# EAGLE board CT_schematic (EAGLE 7.6.0)

Size 100 x 80 mm. Coordinates in mm from the lower left corner, seen from the top.
Outline: 0,0 100,0 100,80 0,80 0,0
Copper layers (1*16): Top 0.035mm / dielectric 1.5mm / Bottom 0.035mm
Design rules "default": minimum track width 10mil, minimum drill 24mil, track to track 8mil, track to pad 8mil, pad to pad 8mil, via to via 8mil, smd to smd 8mil, copper to edge 40mil, drill to drill 8mil, minimum pad ring 10mil, minimum via ring 8mil, stop-mask expansion 4mil, vias tented up to drill 0mil, thermal gap 10mil

## Footprints (pad centres in the part's own frame; a part is rotated, then mirrored left to right if it is on the bottom)
C0603 = smd 0.8 x 0.8: 1 -0.762,0; 2 0.762,0
C0402 = smd 0.5 x 0.5: 1 -0.508,0; 2 0.508,0
C0805 = smd 1.2 x 1.3: 1 -1.016,0; 2 1.016,0
C1206 = smd 1.3 x 1.6: 1 -1.524,0; 2 1.524,0
2220 = smd 1.85 x 5.5: 1 -2.55,0; 2 2.55,0
C1210 = smd 1.2 x 2.5: 1 -1.524,0; 2 1.524,0
EXV-9H = smd 3.505 x 1.676: 1 -2.857,0; 2 2.857,0
L0603 = smd 0.8 x 0.8: 1 -0.762,0; 2 0.762,0
IND_PM3316 = smd 2.921 x 2.794: 1 -5.144,0; 2 5.144,0
L1210 = smd 1.2 x 2.5: 1 -1.524,0; 2 1.524,0
PJ-037B_PACKAGE = drill 3.7 square: 1 12,0 | drill 3.2 square: 2 6,0
R0603 = smd 0.8 x 0.8: 1 -0.762,0; 2 0.762,0
LQFP64 = smd 0.3 x 1.2: 1 -3.75,-5.75; 2 -3.25,-5.75; 3 -2.75,-5.75; 4 -2.25,-5.75; 5 -1.75,-5.75; 6 -1.25,-5.75; 7 -0.75,-5.75; 8 -0.25,-5.75; 9 0.25,-5.75; 10 0.75,-5.75; 11 1.25,-5.75; 12 1.75,-5.75; 13 2.25,-5.75; 14 2.75,-5.75; 15 3.25,-5.75; 16 3.75,-5.75; 33 3.75,5.75; 34 3.25,5.75; 35 2.75,5.75; 36 2.25,5.75; 37 1.75,5.75; 38 1.25,5.75; 39 0.75,5.75; 40 0.25,5.75; 41 -0.25,5.75; 42 -0.75,5.75; 43 -1.25,5.75; 44 -1.75,5.75; 45 -2.25,5.75; 46 -2.75,5.75; 47 -3.25,5.75; 48 -3.75,5.75 | smd 1.2 x 0.3: 17 5.75,-3.75; 18 5.75,-3.25; 19 5.75,-2.75; 20 5.75,-2.25; 21 5.75,-1.75; 22 5.75,-1.25; 23 5.75,-0.75; 24 5.75,-0.25; 25 5.75,0.25; 26 5.75,0.75; 27 5.75,1.25; 28 5.75,1.75; 29 5.75,2.25; 30 5.75,2.75; 31 5.75,3.25; 32 5.75,3.75; 49 -5.75,3.75; 50 -5.75,3.25; 51 -5.75,2.75; 52 -5.75,2.25; 53 -5.75,1.75; 54 -5.75,1.25; 55 -5.75,0.75; 56 -5.75,0.25; 57 -5.75,-0.25; 58 -5.75,-0.75; 59 -5.75,-1.25; 60 -5.75,-1.75; 61 -5.75,-2.25; 62 -5.75,-2.75; 63 -5.75,-3.25; 64 -5.75,-3.75
SSOP-28 = smd 1.5 x 0.4: 1 -3.625,4.225; 2 -3.625,3.575; 3 -3.625,2.925; 4 -3.625,2.275; 5 -3.625,1.625; 6 -3.625,0.975; 7 -3.625,0.325; 8 -3.625,-0.325; 9 -3.625,-0.975; 10 -3.625,-1.625; 11 -3.625,-2.275; 12 -3.625,-2.925; 13 -3.625,-3.575; 14 -3.625,-4.225; 15 3.625,-4.225; 16 3.625,-3.575; 17 3.625,-2.925; 18 3.625,-2.275; 19 3.625,-1.625; 20 3.625,-0.975; 21 3.625,-0.325; 22 3.625,0.325; 23 3.625,0.975; 24 3.625,1.625; 25 3.625,2.275; 26 3.625,2.925; 27 3.625,3.575; 28 3.625,4.225
FCI_10118193-0001LF = smd 0.4 x 1.35: 1 -1.3,2.675; 2 -0.65,2.675; 3 0,2.675; 4 0.65,2.675; 5 1.3,2.675 | smd 1.6 x 1.4: 6 -3.2,2.45; 7 3.2,2.45 | smd 1.9 x 1.9: 8 -1.2,0; 9 1.2,0 | hole 0.5: -3.3,0; 3.3,0
AT24C02D = smd 1.6 x 0.6: 1 -2.475,1.905 | smd 1.55 x 0.6: 2 -2.475,0.635; 3 -2.475,-0.635; 4 -2.475,-1.905; 5 2.475,-1.905; 6 2.475,-0.635; 7 2.475,0.635; 8 2.475,1.905
TDFN-8/6MM = smd 0.3 x 0.75: 1 0,0; 2 0.5,0; 3 1,0; 4 1.5,0; 5 1.5,3; 6 1,3; 7 0.5,3; 8 0,3
SOIC-8 = smd 1.6 x 0.6: 1 -2.7,1.905 | smd 1.55 x 0.6: 2 -2.7,0.635; 3 -2.7,-0.635; 4 -2.7,-1.905; 5 2.7,-1.905; 6 2.7,-0.635; 7 2.7,0.635; 8 2.7,1.905
182-009-MALE = drill 1.194 pad 1.524 octagon: 1 -5.537,10.923; 2 -2.769,10.923; 3 0,10.923; 4 2.769,10.923; 5 5.537,10.923; 6 -4.153,8.08; 7 -1.384,8.08; 8 1.384,8.08; 9 4.153,8.08 | hole 3.048: -12.446,9.501; 12.446,9.501
QFN-32 = smd 0.6 x 0.3: 1 -2.3,1.75; 2 -2.3,1.25; 3 -2.3,0.75; 4 -2.3,0.25; 5 -2.3,-0.25; 6 -2.3,-0.75; 7 -2.3,-1.25; 8 -2.3,-1.75; 17 2.3,-1.75; 18 2.3,-1.25; 19 2.3,-0.75; 20 2.3,-0.25; 21 2.3,0.25; 22 2.3,0.75; 23 2.3,1.25; 24 2.3,1.75 | smd 0.3 x 0.6: 9 -1.75,-2.3; 10 -1.25,-2.3; 11 -0.75,-2.3; 12 -0.25,-2.3; 13 0.25,-2.3; 14 0.75,-2.3; 15 1.25,-2.3; 16 1.75,-2.3; 25 1.75,2.3; 26 1.25,2.3; 27 0.75,2.3; 28 0.25,2.3; 29 -0.25,2.3; 30 -0.75,2.3; 31 -1.25,2.3; 32 -1.75,2.3 | smd 3.2 x 3.2: EXP 0,0
SJ-43515TS-SMT-TR = smd 2.2 x 3: 1 0.6,-7.4; 4 3.4,-7.4 | smd 3 x 3: 2 12.8,-7.4; 5 17,-3 | smd 2 x 3: 3 5.3,0; 6 2.5,0 | drill 1.8: P$7 4.5,-3.69; P$8 11.54,-3.69
WM-64PC = drill 0.6 pad 1: 1 -1,0.95; 2 -1,-0.95
ASEK = smd 1.4 x 1: 1 -1.1,-0.8; 2 1.1,-0.8; 3 1.1,0.8; 4 -1.1,0.8
ASFL1 = smd 1.7 x 1.5: 1 -1.27,-1.1; 2 1.27,-1.1; 3 1.27,1.1; 4 -1.27,1.1
WSON-8 = smd 0.3 x 0.6: 1 -0.75,0; 2 0.05,0; 3 0.85,0; 4 1.65,0; 5 1.65,3.8; 6 0.85,3.8; 7 0.05,3.8; 8 -0.75,3.8 | smd 3 x 2.6: PAD 0.45,1.9
QFN-16_EP = smd 0.805 x 0.3: 1 -1.452,0.75; 2 -1.452,0.25; 3 -1.452,-0.25; 4 -1.452,-0.75; 9 1.452,-0.75; 10 1.452,-0.25; 11 1.452,0.25; 12 1.452,0.75 | smd 0.3 x 0.805: 5 -0.75,-1.452; 6 -0.25,-1.452; 7 0.25,-1.452; 8 0.75,-1.452; 13 0.75,1.452; 14 0.25,1.452; 15 -0.25,1.452; 16 -0.75,1.452 | smd 1.55 x 1.55: 17 0,0
DFN-8_DDB = smd 0.805 x 0.3: 1 -0.952,0.75; 2 -0.952,0.25; 3 -0.952,-0.25; 4 -0.952,-0.75; 5 0.952,-0.75; 6 0.952,-0.25; 7 0.952,0.25; 8 0.952,0.75 | smd 0.61 x 2.2: 9 0,0
SON-6 = smd 0.55 x 0.3: 1 -0.355,0.5 | smd 0.52 x 0.3: 2 -0.37,0; 3 -0.37,-0.5; 4 0.37,-0.5; 5 0.37,0; 6 0.37,0.5
SW_4-1437565-2 = smd 1.4 x 2.1: 1 -2.23,4.55; 2 -2.23,-4.55; 3 2.23,4.55; 4 2.23,-4.55
LGM67K-G1J2-24-Z = smd 0.8 x 1.4: A -2,0; C 0,0
NC7SZ125M5X = smd 1.3 x 0.7: 1 -1.3,0.95; 2 -1.3,0; 3 -1.3,-0.95; 4 1.3,-0.95; 5 1.3,0.95

## Placement (x,y rotation side)
C1  1e-06  [C0603]  -40.64,85.09 0 top  (outside the outline)
C2  1e-07  [C0603]  -44.45,85.09 0 top  (outside the outline)
C3  1e-07  [C0603]  -48.26,85.09 0 top  (outside the outline)
C4  1e-07  [C0603]  -52.07,85.09 0 top  (outside the outline)
C5  1e-07  [C0603]  -55.88,85.09 0 top  (outside the outline)
C6  1e-07  [C0603]  -59.69,85.09 0 top  (outside the outline)
C7  4.7e-06  [C0603]  -29.21,85.09 0 top  (outside the outline)
C8  1e-08  [C0603]  -63.5,85.09 0 top  (outside the outline)
C9  1e-06  [C0603]  -67.31,85.09 0 top  (outside the outline)
C10  1e-07  [C0402]  -15.24,95.25 0 top  (outside the outline)
C11  4.7e-06  [C0805]  -74.93,72.39 0 top  (outside the outline)
C12  1e-07  [C0402]  -19.05,95.25 0 top  (outside the outline)
C13  1e-07  [C0402]  -22.86,95.25 0 top  (outside the outline)
C14  1e-08  [C0402]  -26.67,95.25 0 top  (outside the outline)
C15  1e-08  [C0402]  -30.48,95.25 0 top  (outside the outline)
C16  1e-06  [C0603]  -71.12,85.09 0 top  (outside the outline)
C17  1e-06  [C0603]  -74.93,85.09 0 top  (outside the outline)
C18  1e-06  [C0603]  -78.74,85.09 0 top  (outside the outline)
C19  1e-06  [C0603]  -82.55,85.09 0 top  (outside the outline)
C20  1e-06  [C0603]  -86.36,85.09 0 top  (outside the outline)
C21  1e-06  [C0603]  -90.17,85.09 0 top  (outside the outline)
C22  1e-06  [C0603]  -15.24,90.17 0 top  (outside the outline)
C23  1e-06  [C0603]  -19.05,90.17 0 top  (outside the outline)
C24  1e-06  [C0603]  -22.86,90.17 0 top  (outside the outline)
C25  1e-07  [C0402]  -34.29,95.25 0 top  (outside the outline)
C26  1e-07  [C0402]  -38.1,95.25 0 top  (outside the outline)
C27  1e-07  [C0402]  -41.91,95.25 0 top  (outside the outline)
C28  1e-07  [C0402]  -45.72,95.25 0 top  (outside the outline)
C29  1e-06  [C0603]  -26.67,90.17 0 top  (outside the outline)
C30  1e-08  [C0402]  -49.53,95.25 0 top  (outside the outline)
C31  1e-08  [C0402]  -53.34,95.25 0 top  (outside the outline)
C32  1e-08  [C0402]  -57.15,95.25 0 top  (outside the outline)
C33  1e-08  [C0402]  -60.96,95.25 0 top  (outside the outline)
C34  1e-08  [C0402]  -64.77,95.25 0 top  (outside the outline)
C35  1e-05  [C1206]  -63.5,72.39 0 top  (outside the outline)
C36  1e-05  [C0805]  -80.01,72.39 0 top  (outside the outline)
C37  1e-05  [C0805]  -85.09,72.39 0 top  (outside the outline)
C38  1e-06  [C0603]  -30.48,90.17 0 top  (outside the outline)
C39  1e-07  [C0402]  -68.58,95.25 0 top  (outside the outline)
C40  6.8e-05  [2220]  -62.23,54.61 0 top  (outside the outline)
C41  1e-05  [C1210]  -50.8,72.39 0 top  (outside the outline)
C42  2.2e-06  [C0603]  -33.02,85.09 0 top  (outside the outline)
C43  2.2e-07  [C0603]  -36.83,85.09 0 top  (outside the outline)
C44  1e-07  [C0402]  -72.39,95.25 0 top  (outside the outline)
C45  0.0001  [EXV-9H]  -17.78,73.66 0 top  (outside the outline)
C46  0.0001  [EXV-9H]  -29.21,73.66 0 top  (outside the outline)
C47  1e-08  [C0402]  -76.2,95.25 0 top  (outside the outline)
F1  240.0  [L0603]  -34.29,90.17 0 top  (outside the outline)
I1  2.2e-06  [IND_PM3316]  -66.04,41.91 0 top  (outside the outline)
I2  1e-05  [L1210]  -57.15,72.39 0 top  (outside the outline)
J1  PJ-037B  [PJ-037B_PACKAGE]  -83.82,29.21 0 top  (outside the outline)
R2  1000.0  [R0603]  -38.1,90.17 0 top  (outside the outline)
R4  4700.0  [R0603]  -41.91,90.17 0 top  (outside the outline)
R5  2200.0  [R0603]  -45.72,90.17 0 top  (outside the outline)
R6  2200.0  [R0603]  -49.53,90.17 0 top  (outside the outline)
R7  2200.0  [R0603]  -53.34,90.17 0 top  (outside the outline)
R8  2200.0  [R0603]  -57.15,90.17 0 top  (outside the outline)
R9  10000.0  [R0603]  -40.64,80.01 0 top  (outside the outline)
R10  4700.0  [R0603]  -60.96,90.17 0 top  (outside the outline)
R11  10000.0  [R0603]  -45.72,80.01 0 top  (outside the outline)
R12  10000.0  [R0603]  -50.8,80.01 0 top  (outside the outline)
R13  10000.0  [R0603]  -55.88,80.01 0 top  (outside the outline)
R14  10000.0  [R0603]  -60.96,80.01 0 top  (outside the outline)
R15  10000.0  [R0603]  -66.04,80.01 0 top  (outside the outline)
R16  10000.0  [R0603]  -71.12,80.01 0 top  (outside the outline)
R17  10000.0  [R0603]  -76.2,80.01 0 top  (outside the outline)
R18  10000.0  [R0603]  -81.28,80.01 0 top  (outside the outline)
R19  10000.0  [R0603]  -86.36,80.01 0 top  (outside the outline)
R20  120.0  [R0603]  -64.77,90.17 0 top  (outside the outline)
R21  1270.0  [R0603]  -68.58,90.17 0 top  (outside the outline)
R22  1270.0  [R0603]  -72.39,90.17 0 top  (outside the outline)
R23  100000.0  [R0603]  -90.17,71.12 0 top  (outside the outline)
R24  200.0  [R0603]  -76.2,90.17 0 top  (outside the outline)
R25  1000.0  [R0603]  -80.01,90.17 0 top  (outside the outline)
R26  20000.0  [R0603]  -91.44,80.01 0 top  (outside the outline)
R27  91000.0  [R0603]  -15.24,85.09 0 top  (outside the outline)
R28  300000.0  [R0603]  -15.24,80.01 0 top  (outside the outline)
R29  100000.0  [R0603]  -20.32,80.01 0 top  (outside the outline)
R30  560000.0  [R0603]  -25.4,80.01 0 top  (outside the outline)
R31  10000.0  [R0603]  -20.32,85.09 0 top  (outside the outline)
R32  10000.0  [R0603]  -25.4,85.09 0 top  (outside the outline)
R33  9100.0  [R0603]  -83.82,90.17 0 top  (outside the outline)
R34  680000.0  [R0603]  -30.48,80.01 0 top  (outside the outline)
R35  120000.0  [R0603]  -35.56,80.01 0 top  (outside the outline)
U1  stm32f103rct7  [LQFP64]  -22.86,43.18 0 top  (outside the outline)
U2  FT232RL-REEL  [SSOP-28]  -60.96,7.62 0 top  (outside the outline)
U3  10118193-0001LF  [FCI_10118193-0001LF]  -69.85,63.5 0 top  (outside the outline)
U4  AT24C02D-SSHM-T  [AT24C02D]  -39.37,54.61 0 top  (outside the outline)
U5  24AA64T-I/MNY  [TDFN-8/6MM]  -24.13,53.34 0 top  (outside the outline)
U6  MCP2562-E/SN  [SOIC-8]  -53.34,54.61 0 top  (outside the outline)
U7  182-009-113R531  [182-009-MALE]  -36.83,6.35 0 top  (outside the outline)
U8  SGTL5000XNAA3  [QFN-32]  -83.82,41.91 0 top  (outside the outline)
U9  SJ-43515TS-SMT-TR  [SJ-43515TS-SMT-TR]  -92.71,10.16 0 top  (outside the outline)
U10  SJ-43515TS-SMT-TR  [SJ-43515TS-SMT-TR]  -39.37,31.75 0 top  (outside the outline)
U11  SJ-43515TS-SMT-TR  [SJ-43515TS-SMT-TR]  -67.31,31.75 0 top  (outside the outline)
U12  WM-64PCT  [WM-64PC]  -55.88,41.91 0 top  (outside the outline)
U13  ASEK-32.768KHz-ECST  [ASEK]  -91.44,63.5 0 top  (outside the outline)
U14  ASFL1-12MHZ-NCS  [ASFL1]  -44.45,64.77 0 top  (outside the outline)
U15  ASFL-24.57MHZ-NCS  [ASFL1]  -27.94,64.77 0 top  (outside the outline)
U16  ASFL1-25MHZ-NCS  [ASFL1]  -60.96,64.77 0 top  (outside the outline)
U17  LP3878SDX-ADJ/NOPB  [WSON-8]  -83.82,53.34 0 top  (outside the outline)
U18  LTC3601EUD#PBF  [QFN-16_EP]  -88.9,90.17 0 top  (outside the outline)
U19  LT3494AEDDB#TRMPBF  [DFN-8_DDB]  -80.01,95.25 0 top  (outside the outline)
U20  TPS3895ADRYR  [SON-6]  -85.09,93.98 0 top  (outside the outline)
U21  4-1437565-2  [SW_4-1437565-2]  -44.45,43.18 0 top  (outside the outline)
U22  Q65110A2395  [LGM67K-G1J2-24-Z]  -39.37,72.39 0 top  (outside the outline)
U23  nc7sz125m5x  [NC7SZ125M5X]  -68.58,71.12 0 top  (outside the outline)

## Library data of the parts
C1-C47 F1 I1 I2 J1 R2 R4-R35 U1-U23 = circuit_tree

## Nets
CLK_U1_3: U1.3 U13.3
CLK_U1_5: U1.5 U16.3
CLK_U2_27: U2.27 U14.3
CLK_U8_21: U8.21 U15.3
GND: C1.2 C2.2 C3.2 C4.2 C5.2 C6.2 C7.2 C8.2 C9.2 C10.2 C11.2 C12.2 C13.2 C14.2 C15.2 C16.2 C17.2 C25.2 C26.2 C27.2 C28.2 C29.2 C30.2 C31.2 C32.2 C33.2 C34.2 C35.2 C36.2 C37.2 C38.2 C40.1 C40.2 C41.2 C42.2 C43.2 C44.2 C45.2 C46.2 C47.2 J1.2 R2.2 R9.2 R12.2 R13.2 R15.2 R16.2 R17.2 R22.2 R25.2 R26.2 R28.2 R33.2 R35.2 U1.12 U1.18 U1.31 U1.47 U1.63 U2.7 U2.18 U2.21 U2.25 U2.26 U3.5 U3.6 U3.7 U3.8 U3.9 U4.4 U5.4 U5.7 U6.2 U6.8 U7.5 U8.1 U8.3 U8.7 U8.EXP U10.1 U11.1 U12.2 U13.2 U14.2 U15.2 U16.2 U17.3 U17.PAD U18.1 U18.9 U18.17 U19.2 U19.9 U20.2 U22.C U23.1 U23.3
NET_U1_7: R4.1 U1.7 U23.4
NET_U1_13: C8.1 C9.1 F1.1 U1.13
NET_U1_29: R7.1 U1.29 U4.6
NET_U1_30: R8.1 U1.30 U4.5
NET_U1_58: R5.1 U1.58 U5.6
NET_U1_59: R6.1 U1.59 U5.5
NET_U1_60: R9.1 U1.60
NET_U1_61: U22.A
NET_U1_62: U21.3 U21.4
NET_U2_14: R11.1 U2.14
NET_U2_17: C12.1 U2.17
NET_U2_19: R12.1 U2.19
NET_U3_1: R10.1 U3.1
NET_U3_2: U2.16 U3.2
NET_U3_3: U2.15 U3.3
NET_U3_19: R10.2
NET_U4_1: R14.1 U4.1
NET_U4_2: R15.1 U4.2
NET_U4_3: R16.1 U4.3
NET_U4_7: R13.1 U4.7
NET_U5_1: R17.1 U5.1
NET_U5_2: R18.1 U5.2
NET_U5_3: R19.1 U5.3
NET_U6_6: R20.2 U6.6
NET_U7_2: R20.2 U6.6 U7.2
NET_U7_3: R20.1 U6.7 U7.3
NET_U8_10: C28.1 U8.10
NET_U8_29: R21.1 U8.29
NET_U8_31: R22.1 U8.31
NET_U9_1: U8.4 U9.1
NET_U9_2: U8.2 U9.2
NET_U9_5: U8.6 U9.5
NET_U10_2: C19.1 U10.2
NET_U10_5: C18.1 U10.5
NET_U10_11: C19.2
NET_U10_12: C18.2
NET_U11_2: C21.1 C22.1 U11.2
NET_U11_5: C20.1 U11.5
NET_U11_13: C21.2 C22.2
NET_U11_14: C20.2
NET_U12_1: C23.1 C24.1 C29.1 U8.16 U12.1
NET_U12_15: C23.2 C24.2
NET_U17_1: C34.1 U17.1
NET_U17_6: R24.2 R25.1 U17.6
NET_U17_8: R23.1 U17.8
NET_U18_3: C39.2 I1.1 U18.3 U18.4
NET_U18_6: C39.1 U18.6
NET_U18_7: C38.1 U18.7 U18.12
NET_U18_10: R28.1 U18.10
NET_U18_11: R26.1 R27.1 U18.11
NET_U18_14: U18.14
NET_U18_ATNET_3: I1.2 R27.2
NET_U19_1: I2.1 U19.1
NET_U19_5: R29.1 U19.5
NET_U19_6: R30.1 U19.6
NET_U19_8: C43.1 U19.8
NET_U20_1: R32.1 R33.1 U20.1
NET_U20_3: R34.2 R35.1 U20.3
NET_U20_4: R31.1 U20.4 U23.2
NET_U21_1: R2.1 U21.1 U21.2
PROC_CAN_RX: U1.44 U6.4
PROC_CAN_TX: U1.45 U6.1
PROC_I2S2_CK: U1.34 U8.24
PROC_I2S2_SD: U1.36 U8.26
PROC_I2S2_WS: U1.33 U8.23
PROC_UART4_RX: U1.52 U2.1
PROC_UART4_TX: U1.51 U2.5
VCC_S1_4V8: C35.1 C37.1 C41.1 C45.1 C46.1 I2.2 J1.1 R23.2 R29.2 U17.4 U18.15 U18.16 U19.3 U19.4
VCC_TIER1_1V2: C25.1 C36.1 R24.1 U8.30 U17.5
VCC_TIER1_3V3: C1.1 C2.1 C3.1 C4.1 C5.1 C6.1 C7.1 C10.1 C11.1 C13.1 C14.1 C15.1 C17.1 C26.1 C27.1 C30.1 C31.1 C32.1 C33.1 C40.2 C44.1 C47.1 F1.2 I1.2 R4.2 R5.2 R6.2 R7.2 R8.2 R11.2 R14.2 R18.2 R19.2 R21.2 R27.2 R31.2 R32.2 R34.1 U1.1 U1.19 U1.32 U1.48 U1.64 U2.4 U2.20 U4.8 U5.8 U6.5 U8.5 U8.20 U13.4 U14.4 U15.4 U16.4 U18.8 U20.6 U23.5
VCC_TIER1_5V0: C16.1 C42.1 R30.2 U6.3 U19.7

## Tracks (layer width: path | path; a pad name or v marks a point on that pad's centre or on a via)
CLK_U1_3  (1 unrouted)
CLK_U1_5  (1 unrouted)
CLK_U2_27  (1 unrouted)
CLK_U8_21  (1 unrouted)
GND  (96 unrouted)
NET_U1_7  (2 unrouted)
NET_U1_13  (3 unrouted)
NET_U1_29  (2 unrouted)
NET_U1_30  (2 unrouted)
NET_U1_58  (2 unrouted)
NET_U1_59  (2 unrouted)
NET_U1_60  (1 unrouted)
NET_U1_62  (1 unrouted)
NET_U2_14  (1 unrouted)
NET_U2_17  (1 unrouted)
NET_U2_19  (1 unrouted)
NET_U3_1  (1 unrouted)
NET_U3_2  (1 unrouted)
NET_U3_3  (1 unrouted)
NET_U4_1  (1 unrouted)
NET_U4_2  (1 unrouted)
NET_U4_3  (1 unrouted)
NET_U4_7  (1 unrouted)
NET_U5_1  (1 unrouted)
NET_U5_2  (1 unrouted)
NET_U5_3  (1 unrouted)
NET_U6_6  (1 unrouted)
NET_U7_2  (2 unrouted)
NET_U7_3  (2 unrouted)
NET_U8_10  (1 unrouted)
NET_U8_29  (1 unrouted)
NET_U8_31  (1 unrouted)
NET_U9_1  (1 unrouted)
NET_U9_2  (1 unrouted)
NET_U9_5  (1 unrouted)
NET_U10_2  (1 unrouted)
NET_U10_5  (1 unrouted)
NET_U11_2  (2 unrouted)
NET_U11_5  (1 unrouted)
NET_U11_13  (1 unrouted)
NET_U12_1  (4 unrouted)
NET_U12_15  (1 unrouted)
NET_U17_1  (1 unrouted)
NET_U17_6  (2 unrouted)
NET_U17_8  (1 unrouted)
NET_U18_3  (3 unrouted)
NET_U18_6  (1 unrouted)
NET_U18_7  (2 unrouted)
NET_U18_10  (1 unrouted)
NET_U18_11  (2 unrouted)
NET_U18_ATNET_3  (1 unrouted)
NET_U19_1  (1 unrouted)
NET_U19_5  (1 unrouted)
NET_U19_6  (1 unrouted)
NET_U19_8  (1 unrouted)
NET_U20_1  (2 unrouted)
NET_U20_3  (2 unrouted)
NET_U20_4  (2 unrouted)
NET_U21_1  (2 unrouted)
PROC_CAN_RX  (1 unrouted)
PROC_CAN_TX  (1 unrouted)
PROC_I2S2_CK  (1 unrouted)
PROC_I2S2_SD  (1 unrouted)
PROC_I2S2_WS  (1 unrouted)
PROC_UART4_RX  (1 unrouted)
PROC_UART4_TX  (1 unrouted)
VCC_S1_4V8  (13 unrouted)
VCC_TIER1_1V2  (4 unrouted)
VCC_TIER1_3V3  (56 unrouted)
VCC_TIER1_5V0  (4 unrouted)